# Altium PCB ArcadeRpiSmartShield 33.PcbDoc
Units mm, origin at the board's own origin, x right, y up, seen from the top; angles counter-clockwise.
Board outline 75 x 56.5 mm, 2 copper layers (Top Layer, Bottom Layer), stack 1.525 mm thick; 24 components, 34 nets, 189 pads, 20 vias.
Unrouted connection lines stored in the file: 4.
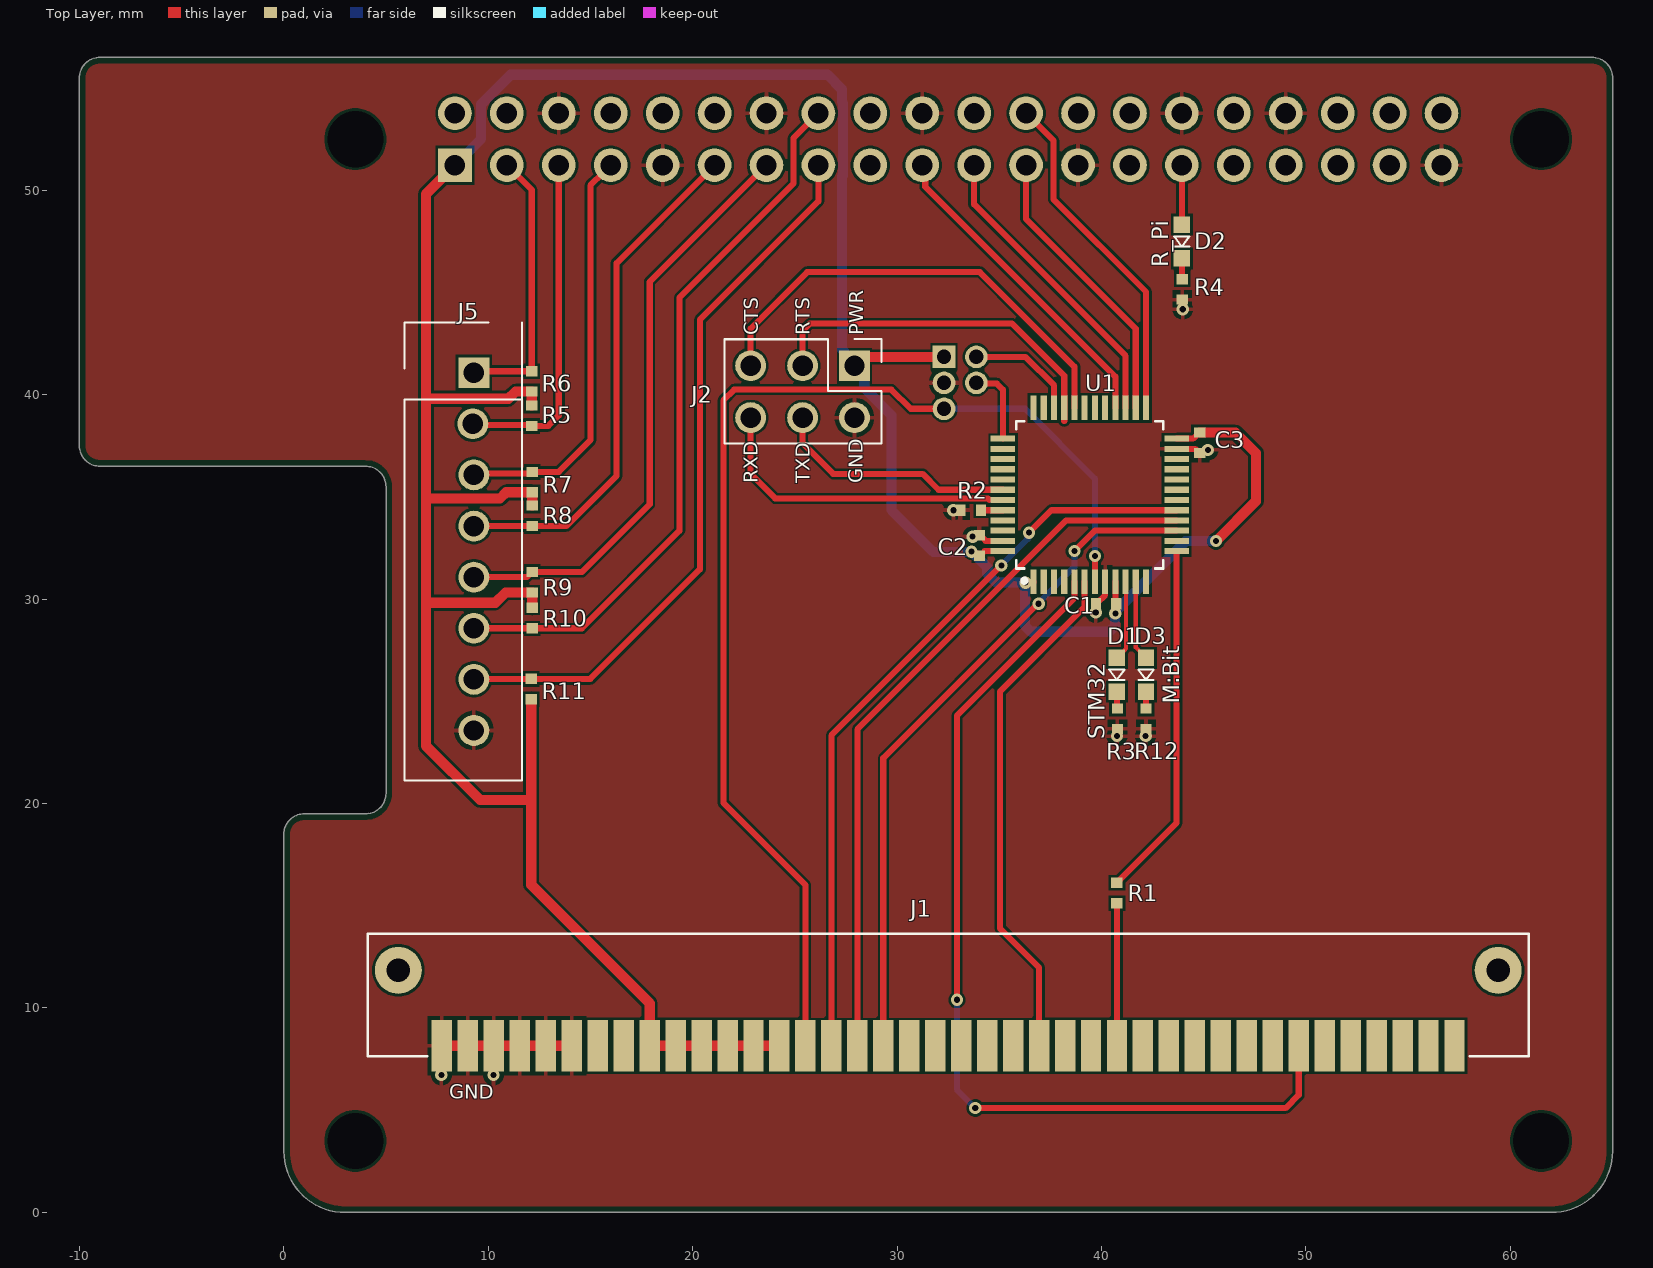
[diagram p0: Top Layer view]
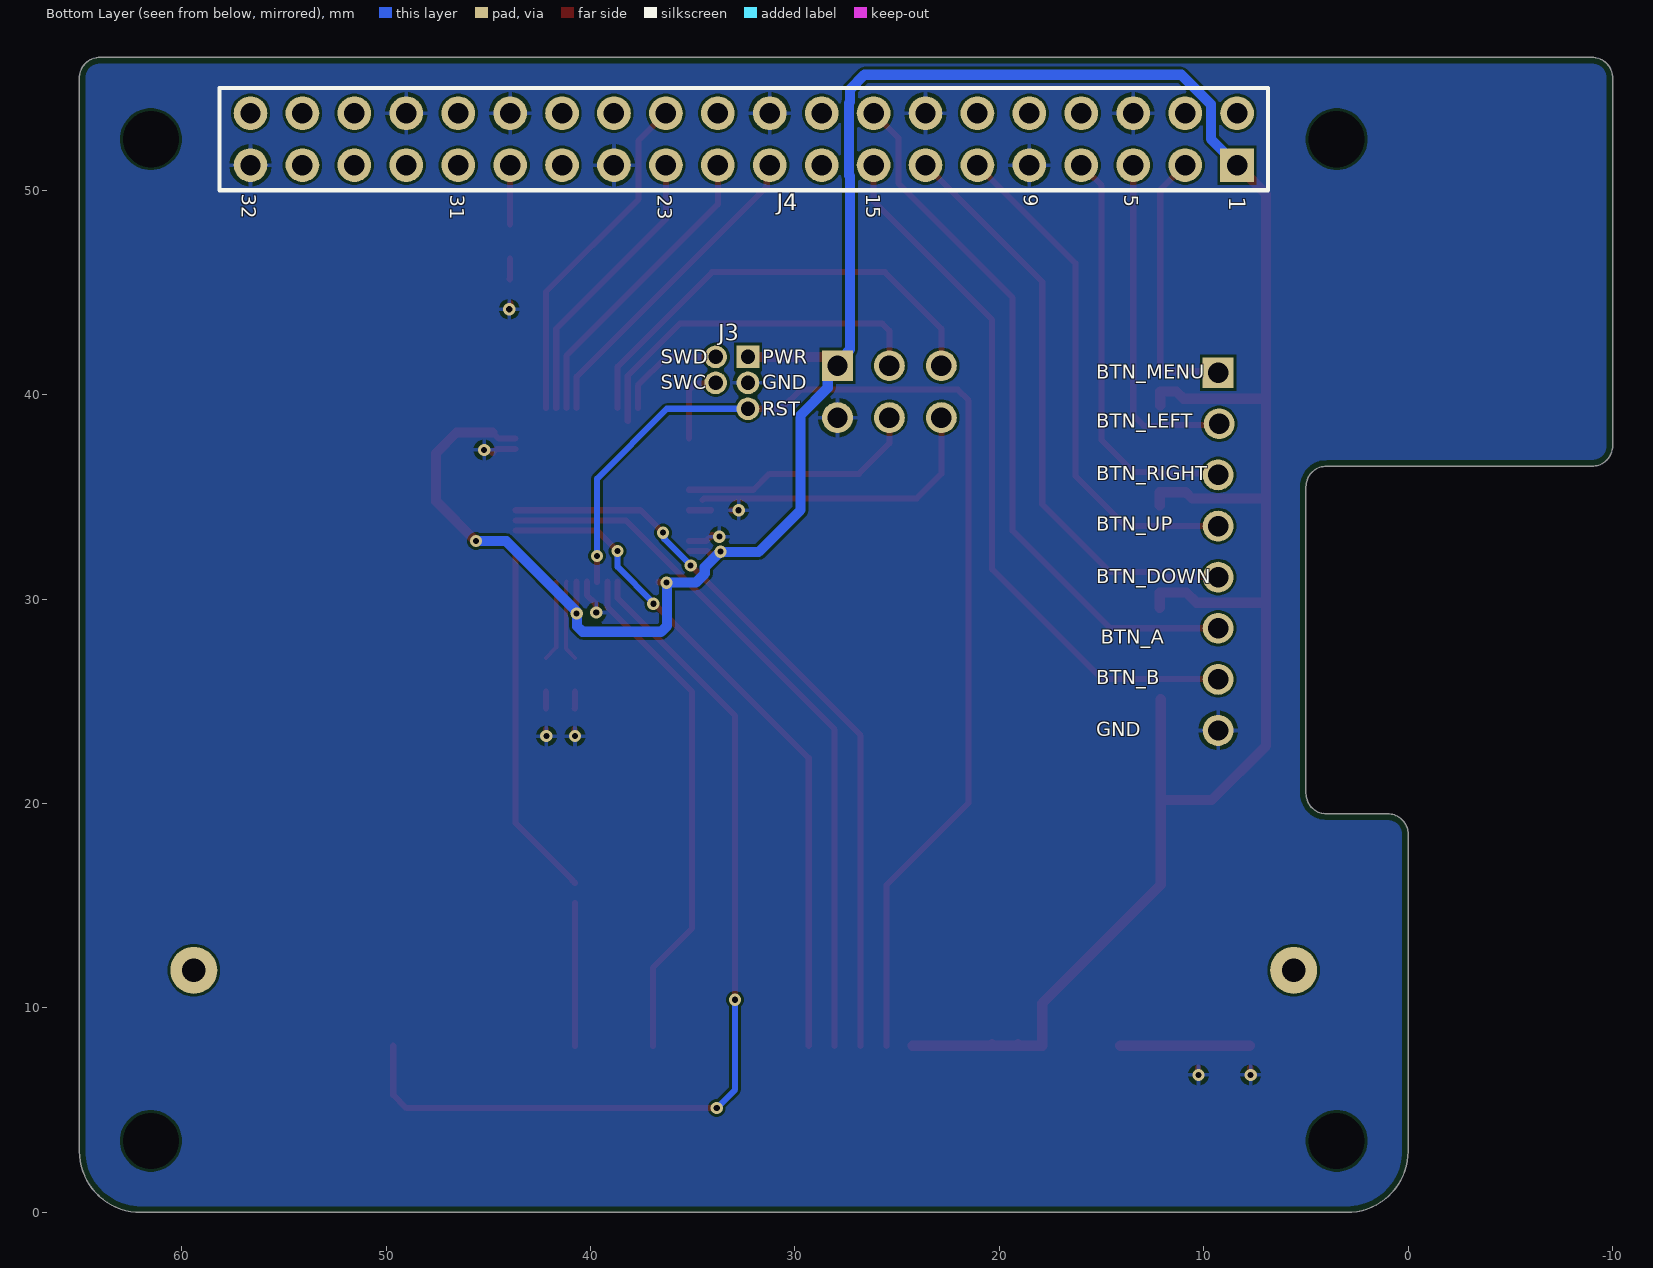
[diagram p1: Bottom Layer view, seen from below]

## Layer stack, top to bottom
Top Solder: solder mask 0.0102, Solder Resist, Dk 3.5
Top Layer: signal copper 0.0356
Dielectric 1: core 1.454, FR-4, Dk 4.2
Bottom Layer: signal copper 0.0356
Bottom Solder: solder mask 0.0102, Solder Resist, Dk 3.5

## Board outline
0,3 0,18.5 cw(c1,18.5) 1,19.5 4,19.5 ccw(c4,20.5) 5,20.5 5,35.5 ccw(c4,35.5) 4,36.5 -9,36.5 cw(c-9,37.5) -10,37.5 -10,55.5 cw(c-9,55.5) -9,56.5 64,56.5 cw(c64,55.5) 65,55.5 65,3 cw(c62,3) 62,0 3,0 cw(c3,3)

## Design rules (kind name [scope] priority, off if disabled: settings)
AssemblyTestPointUsage [All] p1: valid=2
BoardOutlineClearance [All] p1: gap=0.3 ignorepadtopadclearanceinfootprint=FALSE except(0: Arc-SplitContinuation Track-SplitContinuation SMDPad-OutlineEdge SMDPad-SplitContinuation THPad-OutlineEdge THPad-SplitContinuation Via-SplitContinuation Fill-SplitContinuation Poly-SplitContinuation Region-OutlineEdge Region-SplitContinuation Text-SplitContinuation; 0.2: Track-OutlineEdge Text-OutlineEdge)
Clearance [All] p1: gap=0.125 ignorepadtopadclearanceinfootprint=FALSE except(0: Arc-Hole Track-Hole SMDPad-Hole THPad-Hole Via-Hole Fill-Hole Poly-Hole Region-Hole Text-Hole)
ComponentClearance [All] p1: gap=0.2 collisioncheckmode=3 verticalgap=0.2 showdistances=FALSE
DiffPairsRouting [All] p1: maxlimit=2 minlimit=0.15 mostfreqgap=0.15 toplayer_minwidth=0.15 toplayer_maxwidth=2 toplayer_prefwidth=0.15 bottomlayer_minwidth=0.15 bottomlayer_maxwidth=2 bottomlayer_prefwidth=0.15 substack1={CB9D278B-8BF5-444A-AAF4-837A2A9DF42D} toplayer_{cb9d278b-8bf5-444a-aaf4-837a2a9df42d}_minwidth=0.381 toplayer_{cb9d278b-8bf5-444a-aaf4-837a2a9df42d}_maxwidth=0.381 toplayer_{cb9d278b-8bf5-444a-aaf4-837a2a9df42d}_prefwidth=0.381 bottomlayer_{cb9d278b-8bf5-444a-aaf4-837a2a9df42d}_minwidth=0.381 bottomlayer_{cb9d278b-8bf5-444a-aaf4-837a2a9df42d}_maxwidth=0.381 bottomlayer_{cb9d278b-8bf5-444a-aaf4-837a2a9df42d}_prefwidth=0.381 substack2={826B8647-A721-4255-895A-19F9591B9CD1} toplayer_{826b8647-a721-4255-895a-19f9591b9cd1}_minwidth=0.381 toplayer_{826b8647-a721-4255-895a-19f9591b9cd1}_maxwidth=0.381 toplayer_{826b8647-a721-4255-895a-19f9591b9cd1}_prefwidth=0.381 bottomlayer_{826b8647-a721-4255-895a-19f9591b9cd1}_minwidth=0.381 bottomlayer_{826b8647-a721-4255-895a-19f9591b9cd1}_maxwidth=0.381 bottomlayer_{826b8647-a721-4255-895a-19f9591b9cd1}_prefwidth=0.381 substack3={E64FCAF4-1BC8-437D-B1E0-0E5F2DC0F59E} toplayer_{e64fcaf4-1bc8-437d-b1e0-0e5f2dc0f59e}_minwidth=0.381 toplayer_{e64fcaf4-1bc8-437d-b1e0-0e5f2dc0f59e}_maxwidth=0.381 toplayer_{e64fcaf4-1bc8-437d-b1e0-0e5f2dc0f59e}_prefwidth=0.381 bottomlayer_{e64fcaf4-1bc8-437d-b1e0-0e5f2dc0f59e}_minwidth=0.381 bottomlayer_{e64fcaf4-1bc8-437d-b1e0-0e5f2dc0f59e}_maxwidth=0.381 bottomlayer_{e64fcaf4-1bc8-437d-b1e0-0e5f2dc0f59e}_prefwidth=0.381 substack4={E61CE66C-507C-4E1E-8E83-C905434AFC1C} toplayer_{e61ce66c-507c-4e1e-8e83-c905434afc1c}_minwidth=0.381 toplayer_{e61ce66c-507c-4e1e-8e83-c905434afc1c}_maxwidth=0.381 toplayer_{e61ce66c-507c-4e1e-8e83-c905434afc1c}_prefwidth=0.381 bottomlayer_{e61ce66c-507c-4e1e-8e83-c905434afc1c}_minwidth=0.381 bottomlayer_{e61ce66c-507c-4e1e-8e83-c905434afc1c}_maxwidth=0.381 bottomlayer_{e61ce66c-507c-4e1e-8e83-c905434afc1c}_prefwidth=0.381 maxuncoupledlength=25
FabricationTestPointUsage [All] p1: valid=2 allowmultiple=FALSE
HoleSize [All] p1: absolutevalues=TRUE maxlimit=5 minlimit=0.2 maxpercent=80.000 minpercent=20.000
MinimumSolderMaskSliver [All] p1: minsoldermaskwidth=0.005
PlaneClearance [All] p1: clearance=0.3
PlaneConnect [All] p1: planeconnectstyle=Relief reliefexpansion=0.5 reliefentries=4 reliefconductorwidth=0.2 reliefairgap=0.3
PolygonConnect "PolygonConnect GND" [isVIA] p1: connectstyle=Relief reliefconductorwidth=0.2 reliefentries=4 polygonreliefangle="90 Angle" airgapwidth=0.2
PolygonConnect [All] p2: connectstyle=Relief reliefconductorwidth=0.2 reliefentries=4 polygonreliefangle="90 Angle" airgapwidth=0.2
RoutingVias [All] p1: holewidth=0.3 width=0.6 viastyle="Through Hole" minholewidth=0.3 minwidth=0.6 maxholewidth=0.3 maxwidth=0.8
SilkToSilkClearance [All] p1: silktosilkclearance=0.001
SilkToSolderMaskClearance [IsPad] p1: minsilkscreentomaskgap=0.05 clearancetoexposedcopper=TRUE
SolderMaskExpansion [All] p1: expansion=0.075 istentingtop=FALSE
Width [All] p1: maxlimit=2 minlimit=0.15 preferedwidth=0.15 substack1={CB9D278B-8BF5-444A-AAF4-837A2A9DF42D} substack2={826B8647-A721-4255-895A-19F9591B9CD1} substack3={E64FCAF4-1BC8-437D-B1E0-0E5F2DC0F59E} substack4={E61CE66C-507C-4E1E-8E83-C905434AFC1C} minimp=50.000000 maximp=50.000000 favimp=50.000000
20 further rules are at their usual default settings.

## Components (designator, comment, footprint, x,y, rotation, side; value= is the part's Value field where it differs from the comment)
C1 "CL05B104KQ5NNNC" "C0402_0.55MM - without outline" 40.225,29.775 r0 top
C2 "CL05B104KQ5NNNC" "C0402_0.55MM - without outline" 34.025,32.625 r270 top
C3 "CL05B104KQ5NNNC" "C0402_0.55MM - without outline" 44.8,37.65 r90 top
D1 "SML-D12D" "ROHM SML-D12 ORANGE - WITHOUT OUTLINE" 40.75,26.3 r90 top
D2 "SML-D12P" "ROHM SML-D12 GREEN - WITHOUT OUTLINE" 43.93,47.495 r90 top
D3 "SML-D12U" "ROHM SML-D12 RED - WITHOUT OUTLINE" 42.175,26.3 r90 top
J1 "Right Angle 1x40p 1.27 mm pitch edge connector for the micro:bit" MIC127-140-A01 32.5,10 r180 top locked
J2 "HDR 2x3 0.100\"" PREC003DFAN-RC 25.375,40.15 r180 top
J3 "Hack Connect Mini 1.27 mm pitch 2-row" HACK_CONNECT_MINI_5_X_1_27 32.297,41.85 r0 bottom
J4 "SSW-120-01-G-D" SAMTEC-SSW-120-01-G-D 32.5,52.5 r180 bottom locked
J5 "HDR 8x1 0.098\"" B8B-XH-A(LF)(SN) 9.275,32.325 r270 top
R1 "RC0402FR-071KL" "R0402 - Without outline" 40.75,15.625 r270 top
R2 "RC0402FR-07100KL" "R0402 - Without outline" 33.6,34.35 r0 top
R3 "RC0402FR-071KL" "R0402 - Without outline" 40.775,24.15 r90 top
R4 "RC0402FR-071KL" "R0402 - Without outline" 43.95,45.15 r90 top
R5 "RC0402FR-07100KL" "R0402 - Without outline" 12.125,38.975 r270 top
R6 "RC0402FR-07100KL" "R0402 - Without outline" 12.125,40.65 r90 top
R7 "RC0402FR-07100KL" "R0402 - Without outline" 12.15,35.725 r90 top
R8 "RC0402FR-07100KL" "R0402 - Without outline" 12.15,34.075 r270 top
R9 "RC0402FR-07100KL" "R0402 - Without outline" 12.154,30.822 r90 top
R10 "RC0402FR-07100KL" "R0402 - Without outline" 12.15,29.075 r270 top
R11 "RC0402FR-07100KL" "R0402 - Without outline" 12.1,25.6 r90 top
R12 "RC0402FR-071KL" "R0402 - Without outline" 42.175,24.15 r90 top
U1 "STM32F030C8T6" "48-LQFP (7x7)" 39.425,35.1 r90 top

## Footprints (in the part's own frame and the unit in brackets; to place one, negate y for a bottom-side part, rotate by r counter-clockwise, add the part's x,y. Pads: shape width x height; smd on the part's side, far side on the other; paste and mask are expansions set on the pad)
"48-LQFP (7x7)" [mm] "IC MCU 32BIT 64KB FLASH 48LQFP"
  rect 1.2x0.3 smd mask+0.05: 1(-4.25,2.75) 2(-4.25,2.25) 3(-4.25,1.75) 4(-4.25,1.25) 5(-4.25,0.75) 6(-4.25,0.25) 7(-4.25,-0.25) 8(-4.25,-0.75) 9(-4.25,-1.25) 10(-4.25,-1.75) 11(-4.25,-2.25) 12(-4.25,-2.75) 25(4.25,-2.75) 26(4.25,-2.25) 27(4.25,-1.75) 28(4.25,-1.25) 29(4.25,-0.75) 30(4.25,-0.25) 31(4.25,0.25) 32(4.25,0.75) 33(4.25,1.25) 34(4.25,1.75) 35(4.25,2.25) 36(4.25,2.75)
  rect 0.3x1.2 smd mask+0.05: 13(-2.75,-4.25) 14(-2.25,-4.25) 15(-1.75,-4.25) 16(-1.25,-4.25) 17(-0.75,-4.25) 18(-0.25,-4.25) 19(0.25,-4.25) 20(0.75,-4.25) 21(1.25,-4.25) 22(1.75,-4.25) 23(2.25,-4.25) 24(2.75,-4.25) 37(2.75,4.25) 38(2.25,4.25) 39(1.75,4.25) 40(1.25,4.25) 41(0.75,4.25) 42(0.25,4.25) 43(-0.25,4.25) 44(-0.75,4.25) 45(-1.25,4.25) 46(-1.75,4.25) 47(-2.25,4.25) 48(-2.75,4.25)
  silkscreen extent -4.25,-3.6 3.6,3.6, body extent -4.5,-4.5 4.5,4.5, height 1.4
B8B-XH-A(LF)(SN) [mm]
  rect 1.508x1.508 hole 1: 1(-8.75,0.025)
  round 1.508 hole 1: 2(-6.25,-0.025) 3(-3.75,0.025) 4(-1.25,0.025) 5(1.25,0.025) 6(3.75,0.025) 7(6.25,0.025) 8(8.75,0.025)
  silkscreen extent -11.2,-3.38 11.2,2.38, body extent -11.2,-3.38 11.2,2.37, height 7
"C0402_0.55MM - without outline" [mm]
  rect 0.5x0.55 smd: 1(-0.5,0) 2(0.5,0)
  body extent -0.5,-0.25 0.5,0.25, height 0.55
HACK_CONNECT_MINI_5_X_1_27 [mm]
  rect 1.11x1.11 hole 0.7: 1(0,0)
  round 1.11 hole 0.7: 2(1.578,0) 3(0,1.27) 4(1.578,1.27) 5(0,2.54)
MIC127-140-A01 [mm] "Right Angle 1x40p 1.27 mm pitch edge connector for the micro:bit"
  rect 1x2.5 smd paste-0.254: 1(-24.765,1.845) 2(-23.495,1.845) 3(-22.225,1.845) 4(-20.955,1.845) 5(-19.685,1.845) 6(-18.415,1.845) 7(-17.145,1.845) 8(-15.875,1.845) 9(-14.605,1.845) 10(-13.335,1.845) 11(-12.065,1.845) 12(-10.795,1.845) 13(-9.525,1.845) 14(-8.255,1.845) 15(-6.985,1.845) 16(-5.715,1.845) 17(-4.445,1.845) 18(-3.175,1.845) 19(-1.905,1.845) 20(-0.635,1.845) 21(0.635,1.845) 22(1.905,1.845) 23(3.175,1.845) 24(4.445,1.845) 25(5.715,1.845) 26(6.985,1.845) 27(8.255,1.845) 28(9.525,1.845) 29(10.795,1.845) 30(12.065,1.845) 31(13.335,1.845) 32(14.605,1.845) 33(15.875,1.845) 34(17.145,1.845) 35(18.415,1.845) 36(19.685,1.845) 37(20.955,1.845) 38(22.225,1.845) 39(23.495,1.845) 40(24.765,1.845)
  round 2.3 hole 1.15 unplated mask+0: ""(-26.9,-1.845) ""(26.9,-1.845)
  silkscreen extent -28.4,-3.64 28.4,2.36, body extent -28.37,-3.62 28.43,2.77, height 10.1
PREC003DFAN-RC [mm]
  rect 1.508x1.508 hole 1: 1(-2.54,-1.27)
  round 1.508 hole 1: 2(-2.54,1.27) 3(0,-1.27) 4(0,1.27) 5(2.54,-1.27) 6(2.54,1.27)
  silkscreen extent -3.86,-2.58 3.81,2.54, body extent -3.77,-2.55 3.85,2.53, height 10.66
"R0402 - Without outline" [mm]
  rect 0.5x0.55 smd: 1(-0.5,0) 2(0.5,0)
  body extent -0.5,-0.25 0.5,0.25, height 0.35
"ROHM SML-D12 GREEN - WITHOUT OUTLINE" [mm]
  rect 0.8x0.8 smd paste-0.05: 1(-0.825,0) 2(0.825,0)
  silkscreen extent -0.25,-0.38 0.25,0.38, body extent -0.8,-0.4 0.8,0.4, height 0.55
"ROHM SML-D12 ORANGE - WITHOUT OUTLINE" [mm]
  rect 0.8x0.8 smd paste-0.05: 1(-0.825,0) 2(0.825,0)
  silkscreen extent -0.25,-0.38 0.25,0.38, body extent -0.8,-0.4 0.8,0.4, height 0.54
"ROHM SML-D12 RED - WITHOUT OUTLINE" [mm]
  rect 0.8x0.8 smd paste-0.05: 1(-0.825,0) 2(0.825,0)
  silkscreen extent -0.25,-0.38 0.25,0.38, body extent -0.8,-0.4 0.8,0.4, height 0.55
SAMTEC-SSW-120-01-G-D [mm]
  rect 1.65x1.65 / inner round 1.65 / far side rect 1.65x1.65 hole 1 mask+0: 1(24.13,-1.27)
  round 1.65 hole 1 mask+0: 2(24.13,1.27) 3(21.59,-1.27) 4(21.59,1.27) 5(19.05,-1.27) 6(19.05,1.27) 7(16.51,-1.27) 8(16.51,1.27) 9(13.97,-1.27) 10(13.97,1.27) 11(11.43,-1.27) 12(11.43,1.27) 13(8.89,-1.27) 14(8.89,1.27) 15(6.35,-1.27) 16(6.35,1.27) 17(3.81,-1.27) 18(3.81,1.27) 19(1.27,-1.27) 20(1.27,1.27) 21(-1.27,-1.27) 22(-1.27,1.27) 23(-3.81,-1.27) 24(-3.81,1.27) 25(-6.35,-1.27) 26(-6.35,1.27) 27(-8.89,-1.27) 28(-8.89,1.27) 29(-11.43,-1.27) 30(-11.43,1.27) 31(-13.97,-1.27) 32(-13.97,1.27) 33(-16.51,-1.27) 34(-16.51,1.27) 35(-19.05,-1.27) 36(-19.05,1.27) 37(-21.59,-1.27) 38(-21.59,1.27) 39(-24.13,-1.27) 40(-24.13,1.27)
  silkscreen extent -25.65,-2.5 25.65,2.5, body extent -25.65,-2.48 25.65,2.48, height 8.51

## Part data
C1 C2 C3: "CAP CER 0.1UF 6.3V X7R 0402", Capacitance=100nF, Case Code (Imperial)=0402, Case Code (Metric)=1005, Dielectric=X7R, Manufacturer=Samsung, Max Operating Temperature=125°C, Min Operating Temperature=-55°C, Supplier Part Number 1=1276-1511-1-ND, Tolerance=10%, Voltage Rating=6.3V, Case/Package=0402, Category=Capacitors, Checked By=?, ComponentLink1Description="Online datasheet", ComponentLink1URL=https://datasheet.ciiva.com/25709/cl05b104kq5nnnc-25709268.pdf, Created By="D. Gakure", Depth=0.5mm, Height=0.5mm, Lead Free="Lead Free", Length=1mm, Manufacturer Part Number=CL05B104KQ5NNNC, Mount="Surface Mount", Packaging="Tape and Reel", Pricing 1="1=0.10000, 10=0.02500, 50=0.01380, 100=0.01130, 500=0.00804, 1000=0.00632, 2500=0.00575, 5000=0.00529 (USD)", Pricing 2="1=0.10000, 10=0.02800, 100=0.01200, 500=0.00800, 1000=0.00600, 2500=0.00600 (USD)", Radiation Hardening=No, RoHS=Yes, Stock 1=259020, Stock 2=20000, Supplier 1=Digi-Key, Supplier 2=Mouser, Supplier Part Number 2=187-CL05B104KQ5NNNC, Thickness=0.022inch, Voltage Rating (DC)=6.3V, Width=0.02inch
D1: "1.6 x 0.8 x 0.55mm (0603) LED 605nm Orange", Colour=Orange, Current - Test=20mA, Luminous Flux @ Current - Test=-, Manufacturer="Rohm Semiconductor", Manufacturer Part Number=SML-D12D8WT86, Millicandela Rating=100mcd, Package / Case="0603 (1608 Metric)", Supplier Part Number 1=511-1577-1-ND, Voltage - Forward (Vf) (Typ)=2.2V, Category=Optoelectronics, ComponentLink1Description="Online datasheet", ComponentLink1URL=https://d1d2qsbl8m0m72.cloudfront.net/en/products/databook/datasheet/opto/led/chip_mono/sml-d12x8_d13x8-e.pdf, Height=0.55mm, Lens Style/Size="Rectangle with Flat Top, 1.2mm x 0.8mm", Lens Type="Diffused, White", Mounting Type="Surface Mount", Packaging="Cut Tape (CT)", Pricing 1="1=0.38, 10=0.279, 25=0.2232, 100=0.1478, 250=0.1046, 500=0.08926, 1000=0.06974 (GBP)", RoHS="RoHS Compliant", Size / Dimension="1.60mm L x 0.80mm W", Stock 1=1719, Supplier 1=Digi-Key, Viewing Angle=-, Wavelength - Dominant=605nm, Wavelength - Peak=-
D2: "1.6 x 0.8 x 0.55mm (0603) LED 560nm Green", Colour=Green, Current - Test=20mA, Luminous Flux @ Current - Test=-, Manufacturer="Rohm Semiconductor", Manufacturer Part Number=SML-D12P8WT86, Millicandela Rating=6.3mcd, Package / Case="0603 (1608 Metric)", Supplier Part Number 1=511-1579-1-ND, Voltage - Forward (Vf) (Typ)=2.2V, Category=Optoelectronics, ComponentLink1Description="Online datasheet", ComponentLink1URL=https://d1d2qsbl8m0m72.cloudfront.net/en/products/databook/datasheet/opto/led/chip_mono/sml-d12x8_d13x8-e.pdf, Height=0.55mm, Lens Style/Size="Rectangle with Flat Top, 1.2mm x 0.8mm", Lens Type="Diffused, White", Mounting Type="Surface Mount", Packaging="Cut Tape (CT)", Pricing 1="1=0.38, 10=0.279, 25=0.2232, 100=0.1478, 250=0.1046, 500=0.08926, 1000=0.06974 (GBP)", RoHS="RoHS Compliant", Size / Dimension="1.60mm L x 0.80mm W", Stock 1=19305, Supplier 1=Digi-Key, Viewing Angle=-, Wavelength - Dominant=560nm, Wavelength - Peak=-
D3: "1.6 x 0.8 x 0.55mm (0603) LED 620nm Red", Colour=Red, Current - Test=20mA, Luminous Flux @ Current - Test=-, Manufacturer="Rohm Semiconductor", Manufacturer Part Number=SML-D12U8WT86, Millicandela Rating=63mcd, Package / Case="0603 (1608 Metric)", Supplier Part Number 1=511-1580-1-ND, Voltage - Forward (Vf) (Typ)=2.2V, Category=Optoelectronics, ComponentLink1Description="Online datasheet", ComponentLink1URL=https://d1d2qsbl8m0m72.cloudfront.net/en/products/databook/datasheet/opto/led/chip_mono/sml-d12x8_d13x8-e.pdf, Height=0.55mm, Lens Style/Size="Rectangle with Flat Top, 1.2mm x 0.8mm", Lens Type="Diffused, White", Mounting Type="Surface Mount", Packaging="Cut Tape (CT)", Pricing 1="1=0.38, 10=0.279, 25=0.2232, 100=0.1478, 250=0.1046, 500=0.08926, 1000=0.06974 (GBP)", RoHS="RoHS Compliant", Size / Dimension="1.60mm L x 0.80mm W", Stock 1=5722, Supplier 1=Digi-Key, Supplier 2=Farnell, Supplier Part Number 2=1685094, Viewing Angle=-, Wavelength - Dominant=620nm, Wavelength - Peak=-
J1: library part MIC127-140-A01, "\"Right Angle\" 1x40p 1.27mm Dongguan Yuliang BBC micro:bit edge connector", Manufacturer="Dongguan Yuliang", ComponentLink1Description="Yuliang drawing", ComponentLink1URL=http://www.dgyuliang.net/d/file/Produtcs/Customized%20Connector/MICRO%20BIT%20Connector/0d43030af84ade6fc3f00e242079c055.pdf, Manufacturer Part Number=MIC127-140-A01
J2: library part PREC003DFAN-RC, "CONN HEADER VERT 6POS 2.54MM", Color=Black, Manufacturer=Sullins, Package Quantity=1, Supplier Part Number 1=S2212EC-03-ND, Category=Connectors, Checked By=?, ComponentLink1Description="Online datasheet", ComponentLink1URL=https://datasheet.ciiva.com/741/xrxczzzdxxn-rc-11636-b-741002.pdf, Connector Type="Male Pin", Contact Mating Length=0.318inch, Contact Plating=Tin, Contact Type="Male Pin", Created By="D. Gakure", Manufacturer Part Number=PREC003DFAN-RC, Mount="Through Hole", Number of Positions=6, Number of Rows=2, Packaging=Bulk, Pitch=0.1inch, Pricing 1="1=0.16000, 10=0.15100, 25=0.12920, 50=0.11280, 100=0.10480, 250=0.09272, 500=0.08870 (USD)", RoHS=Yes, RoHS Compliant=Yes, Row Spacing=0.1inch, Stock 1=1243, Supplier 1=Digi-Key, Termination=Solder
J3: library part HACK_CONNECT_MINI
J4: "20 position 2 row (40 way) 0.1\" TH socket", Color=Black, Contact Resistance=10mR, Current Rating=6.9A, Manufacturer=Samtec, Max Operating Temperature=125°C, Max Voltage Rating (AC)=550V, Min Operating Temperature=-55°C, Supplier Part Number 1=SAM1208-20-ND, ComponentLink1Description="samtec catalogue page online", ComponentLink1URL=http://suddendocs.samtec.com/catalog_english/ssw_th.pdf, ComponentLink2Description="samtec drawing online", ComponentLink2URL=http://suddendocs.samtec.com/prints/ssw-1xx-xx-xxx-x-xx-xxx-xx-mkt.pdf, Connector Type=Receptacle,Socket, Contact Material=Bronze, Contact Plating=Gold, Depth=4.95mm, Gender=Receptacle, Housing Color=Black, Housing Material=Polymer, Lead Free="Lead Free", Lead Pitch=2.54mm, Length=51.31mm, Manufacturer Part Number=SSW-120-01-G-D, Mating Cycles=100, Max Current Rating=6.9A, Mount="Through Hole", Number of Contacts=40, Number of Positions=40, Number of Rows=2, Orientation=Straight, Packaging=Bulk, Pitch=2.54mm, Pricing 1="1=5.36000, 10=5.14900, 25=4.72040, 50=4.50580, 100=4.29120, 250=3.75480, 500=3.64752 (USD)", Radiation Hardening=No, REACH SVHC="No SVHC", RoHS=Yes, Row Spacing=0.1inch, Stock 1=0, Supplier 1=Digi-Key, Supplier 2=Farnell, Supplier 3=Mouser, Supplier 4=RSComponents, Supplier Part Number 2=1668397, Supplier Part Number 3=200-SSW12001GD, Supplier Part Number 4=7655802, Termination=Solder, Voltage Rating=550V
J5: library part B8B-XH-A(LF)(SN), "CONN HEADER VERT 8POS 2.5MM", Color=Natural, Contact Resistance=20mR, Current Rating=3A, Housing Color=White, Insulation Resistance=1GR, Manufacturer=JST, Max Operating Temperature=85°C, Max Voltage Rating (AC)=250V, Min Operating Temperature=-25°C, Supplier Part Number 1=455-2251-ND, Category="FFC / FPC", Checked By=?, ComponentLink1Description="Online datasheet", ComponentLink1URL=https://datasheet.ciiva.com/26894/getdatasheetpartid-440408-26894817.pdf, Connector Type="Male Pin", Contact Material=Brass, Contact Plating=Tin,Copper,Lead, Created By="D. Gakure", Depth=5.75mm, Fastening Type=Detent, Housing Material=Polyamide, Lead Free="Lead Free", Lead Pitch=2.5mm, Length=22.4mm, Manufacturer Part Number=B8B-XH-A(LF)(SN), Max Current Rating=3A, Mount="Through Hole", Number of Contacts=8, Number of Positions=8, Number of Rows=1, Orientation=Straight, Packaging=Bulk, Pitch=2.5mm, Pricing 1="1=0.360000, 10=0.341000, 100=0.238700, 500=0.204580, 1000=0.170480, 5000=0.146130, 10000=0.136390 (USD)", Pricing 2="10=0.27000, 100=0.18800, 500=0.16200, 1000=0.13500, 2500=0.12500, 5000=0.11500 (GBP)", REACH SVHC="No SVHC", RoHS=Yes, Stock 1=6017, Stock 2=11541, Supplier 1=Digi-Key, Supplier 2=Farnell, Supplier Part Number 2=1516284, Termination=Press-Fit, Voltage Rating=250V, Voltage Rating (AC)=250V, Wire/Cable Gauge=22AWG
R1 R3 R4 R12: "RES SMD 1K OHM 1% 1/16W 0402", Case Code (Imperial)=0402, Case Code (Metric)=1005, Manufacturer=Yageo, Max Operating Temperature=155°C, Min Operating Temperature=-55°C, Power Rating=62.5mW, Resistance=1kR, Resistor Type="Thick Film", Supplier Part Number 1=311-1.00KLRDKR-ND, Temperature Coefficient=100ppm/°C, Tolerance=1%, Voltage Rating=50V, Case/Package=0402, Category=Resistors, Checked=?, ComponentLink2Description="Online datasheet", ComponentLink2URL=https://datasheet.ciiva.com/12666/pyu-rc0402-51-rohs-l-6-r-12666741.pdf, Created=D.G, Depth=0.5mm, Height=0.32mm, Lead Free="Lead Free", Length=1mm, Manufacturer Part Number=RC0402FR-071KL, Military Standard=Not, Number of Pins=2, Packaging="Tape and Reel", Pricing 1="1=0.10000, 10=0.01400, 100=0.00580, 1000=0.00262, 2500=0.00228, 5000=0.00188 (USD)", Pricing 2="1=0.10000, 10=0.01200, 100=0.00400, 1000=0.00400, 2500=0.00400, 10000=0.00300 (USD)", Pricing 3="1=0.08130, 25=0.01210, 100=0.01120, 250=0.01030, 500=0.00900 (GBP)", REACH SVHC=Unknown, RoHS=Yes, Stock 1=37591306, Stock 2=11912978, Stock 3=29900, Supplier 1=Digi-Key, Supplier 2=Mouser, Supplier 3=Farnell, Supplier Part Number 2=603-RC0402FR-071KL, Supplier Part Number 3=2132441, Termination=SMD/SMT, Voltage Rating (DC)=50V, Width=0.5mm
R2 R5 R6 R7 R8 R9 R10 R11: "RES SMD 100K OHM 1% 1/16W 0402", Case Code (Imperial)=0402, Case Code (Metric)=1005, Manufacturer=Yageo, Max Operating Temperature=155°C, Max Power Dissipation=63mW, Min Operating Temperature=-55°C, Package Quantity=1, Resistance=100kR, Resistor Type="Thick Film", Supplier Part Number 1=311-100KLRCT-ND, Temperature Coefficient=100ppm/°C, Tolerance=1%, Voltage Rating=50V, Case/Package=0402, Category=Resistors, Checked By=?, ComponentLink2Description="Online datasheet", ComponentLink2URL=https://datasheet.ciiva.com/2453/pyu-r-int-thick-7-2453361.pdf, Created By=DG, Depth=0.5mm, Features="Moisture Resistant", Height=0.016inch, Lead Free="Lead Free", Length=0.039inch, Manufacturer Part Number=RC0402FR-07100KL, Military Standard=Not, Number of Terminations=2, Packaging="Tape and Reel", Power Rating=63mW, Pricing 1="1=0.10000, 10=0.01400, 100=0.00580, 1000=0.00262, 2500=0.00228, 5000=0.00188 (USD)", Pricing 2="1=0.10000, 10=0.01200, 100=0.00400, 1000=0.00400, 2500=0.00400, 10000=0.00300 (USD)", Pricing 3="1=0.10200, 25=0.01220, 100=0.01200, 250=0.01020, 500=0.00890 (GBP)", REACH SVHC="No SVHC", RoHS=Yes, Stock 1=5819191, Stock 2=4458847, Stock 3=19392, Supplier 1=Digi-Key, Supplier 2=Mouser, Supplier 3=Farnell, Supplier Part Number 2=603-RC0402FR-07100KL, Supplier Part Number 3=2131798, Termination=SMD/SMT, Width=0.02inch, Working Voltage=50V
U1: "MCU 32-bit STM32F ARM Cortex M0 RISC 64KB Flash 2.5V/3.3V 48-Pin LQFP Tray", Case/Package=LQFP, Frequency=48MHz, Manufacturer=STMicroelectronics, Max Operating Temperature=85°C, Max Power Dissipation=364mW, Max Supply Voltage=3.6V, Min Operating Temperature=-40°C, Min Supply Voltage=2.4V, Package Quantity=250, Supplier Part Number 1=497-14043-ND, Category=Microcontrollers, Checked By=?, ComponentLink1Description="Online datasheet", ComponentLink1URL=https://datasheet.ciiva.com/28647/1792126-28647793.pdf, Contact Plating=Tin,Matte, Core Architecture=ARM, Created By="D. Gakure", Data Bus Width=32b, Height=1.45mm, Interface=I2C,SPI,UART,USART, Lead Free="Lead Free", Length=7.2mm, Manufacturer Part Number=STM32F030C8T6, Max Frequency=48MHz, Memory Size=64KB, Memory Type=FLASH, Number of ADC Channels=12, Number of I2C Channels=2, Number of I/Os=39, Number of Pins=48, Number of Programmable I/O=39, Number of PWM Channels=6, Number of SPI Channels=2, Number of Timers/Counters=7, Oscillator Type=Internal, Packaging=Tray, Peripherals=POR,PWM,WDT,DMA, Pricing 1="1=2.31000, 10=2.07200, 25=1.95520, 80=1.66575, 250=1.56408, 500=1.36856, 1000=1.30340 (USD)", Pricing 2="1=2.19000, 10=1.88000, 100=1.63000, 500=1.38000, 1000=1.16000, 2500=1.13000 (USD)", Radiation Hardening=No, RAM Size=8KB, REACH SVHC="No SVHC", RoHS=Yes, RoHS Compliant=Yes, Stock 2=325, Supplier 1=Digi-Key, Supplier 2=Avnet, Supplier Part Number 2=39X0182, Watchdog Timer=Yes, Width=7.2mm

## Free pads (board coordinates)
  round 0 hole 2.75 unplated mask+3.1: 7(3.5,3.5) 7(3.5,52.5) 7(61.5,3.5) 7(61.5,52.5)

## Via types
v1: diameter 0.6, hole 0.3, Top Layer to Bottom Layer, tented both sides, 20 vias

## Nets (pads, with @x,y where several pads share a name; then routed paths per layer and width w, separated by ;. In a path a pad name is that pad's centre, name@x,y a point inside that pad or via, vN(x,y) a via of type N, cw(c..) or ccw(c..) an arc to the next point about the centre after c; other vN are vias at no path point)
BTN_A: J4.16 J5.6 R10.2 | length 35.3
  Top Layer w0.3: J5.6 R10.2 14.583,28.575 19.35,33.342 19.35,44.75 24.925,50.325 24.925,52.545 J4.16
BTN_B: J4.15 J5.7 R11.2 | length 35.5
  Top Layer w0.3: J5.7 9.312,26.087 12.088,26.087 R11.2 15,26.1 20.35,31.45 20.35,43.665 26.15,49.465 J4.15
BTN_DOWN: J4.13 J5.5 R9.2 | length 29
  Top Layer w0.3: J5.5 11.882,31.075 12.116,31.31 R9.2@12.141,31.31 ; R9.2 14.583,31.322 17.9,34.639 17.9,45.52 J4.13
BTN_LEFT: J4.5 J5.2 R5.2 | length 16.7
  Top Layer w0.3: J5.2 9.3,38.525 12.075,38.525 R5.2 12.938,38.475 13.45,38.988 J4.5
BTN_MB_A: J1.7 U1.5 | length 47
  Top Layer w0.3: v1(32.925,10.4) 32.925,24.3 38.675,30.05 U1.5 ; v1(33.825,5.107) 49.006,5.107 49.645,5.746 J1.7
  Bottom Layer w0.3: v1(32.925,10.4) 32.925,6.007 33.807,5.125 v1@33.825,5.125
BTN_MB_B: J1.17 U1.6 | length 25.2
  Top Layer w0.3: J1.17 36.945,11.98 35.025,13.9 35.025,25.475 39.175,29.625 U1.6
BTN_MENU: J4.3 J5.1 R6.2 | length 13.4
  Top Layer w0.3: J5.1 9.375,41.15 R6.2 12.125,50.015 J4.3
BTN_RIGHT: J4.7 J5.3 R7.2 | length 20.5
  Top Layer w0.3: J5.3 9.375,36.15 12.075,36.15 R7.2 13.45,36.225 15,37.775 15,50.24 15.625,50.865 15.99,50.865 J4.7
BTN_UP: J4.11 J5.4 R8.2 | length 25.9
  Top Layer w0.3: J5.4@9.531,33.344 J5.4 R8.2 13.825,33.575 16.275,36.025 16.275,46.435 J4.11
  Bottom Layer w0.3: J4.11@21.07,50.87 J4.11
CTS: J2.5 U1.32 | length 22.7
  Top Layer w0.3: J2.5 22.835,43.235 25.6,46 34.051,46 38.675,41.376 U1.32
FLOW: R1.1 U1.13 | length 17.5
  Top Layer w0.3: R1.1 40.775,16.125 40.875,16.225 40.875,16.25 43.675,19.05 U1.13
GND: C1.1 C2.1 C3.1 J1.35 J1.36 J1.37 J1.38 J1.39 J1.40 J2.2 J3.3 J4.6 J4.9 J4.14 J4.20 J4.25 J4.30 J4.34 J4.39 J5.8 R2.1 R3.1 R4.1 R12.1 U1.8 U1.23 U1.47 | length 13.3
  Top Layer w0.3: v1@7.725,6.725 J1.40@7.725,7.075 ; v1@10.275,6.725 J1.38@10.275,7.075 ; v1(32.75,34.35) R2.1 ; v1(33.695,33.055) 33.73,33.09 33.99,33.09 C2.1 34.05,33.125 34.325,32.85 U1.47 ; v1(39.716,29.346) 39.721,29.35 39.721,29.771 C1.1 ; C1.1@39.775,29.8 40.175,30.2 U1.8 ; v1@40.775,23.3 R3.1 ; v1@42.175,23.3 R12.1 ; U1.23 44.575,37.35 44.775,37.15 C3.1 44.89,37.24 45.143,37.24 v1(45.2,37.297) ; v1@43.915,44.237 R4.1@43.915,44.49
  Top Layer w0.5: J1.40 J1.39 J1.38 J1.37 J1.36 J1.35
  other v1: 7.707,6.725 10.257,6.725 40.757,23.3 42.157,23.3 43.972,44.18
M:Bit_STATUS: D3.2 U1.11 | length 3.9
  Top Layer w0.2: U1.11 41.675,27.625 D3.2
MB_MISO: J1.24 U1.16 | length 35.3
  Top Layer w0.3: J1.24 28.055,23.63 38.275,33.85 U1.16
MB_MOSI: J1.25 U1.17 | length 36.8
  Top Layer w0.3: J1.25 26.785,23.335 v1(35.1,31.65) ; v1(36.449,33.252) 37.547,34.35 U1.17
  Bottom Layer w0.3: v1(35.1,31.65) 36.392,32.942 36.392,33.195 v1(36.449,33.252)
MB_SCLK: J1.23 U1.15 | length 33.5
  Top Layer w0.3: J1.23 29.325,22.225 36.875,29.775 v1(36.925,29.775) ; v1(38.675,32.35) 39.675,33.35 U1.15
  Bottom Layer w0.3: v1(36.925,29.775) 36.925,29.825 38.675,31.575 v1(38.675,32.35)
NetD1_1: D1.1 R3.2 | length 0.8
  Top Layer w0.3: D1.1 40.762,25.463 40.762,24.662 R3.2
NetD2_1: D2.1 R4.2 | length 1
  Top Layer w0.3: D2.1 43.94,46.66 43.94,45.66 R4.2 R4.2@43.963,45.662
NetD3_1: D3.1 R12.2 | length 0.8
  Top Layer w0.3: R12.2 D3.1
NetJ1_14: J1.14 R1.2 | length 7
  Top Layer w0.3: R1.2 40.75,8.16 J1.14
NetR2_2: R2.2 U1.44 | length 1.1
  Top Layer w0.3: R2.2 U1.44
nRESET: J1.26 J3.5 U1.7 | length 58.5
  Top Layer w0.3: J1.26 25.515,16.02 21.5,20.035 21.5,39.725 22.025,40.25 29.725,40.25 30.665,39.31 J3.5 ; U1.7 v1(39.675,32.107) v1@39.675,32.125
  Bottom Layer w0.3: J3.5 36.265,39.31 39.675,35.9 v1(39.675,32.107)
PI_3V3: C1.2 C2.2 C3.2 J1.27 J1.28 J1.29 J1.30 J1.31 J1.32 J2.1 J3.1 J4.1 R5.1 R6.1 R7.1 R8.1 R9.1 R10.1 R11.1 U1.1 U1.9 U1.24 U1.48 | length 162.6
  Top Layer w0.3: v1(33.643,32.323) 33.725,32.323 33.823,32.225 33.925,32.225 C2.2 34.05,32.125 34.275,32.35 U1.48 ; v1@36.276,30.825 36.675,30.825 U1.1 ; v1(40.675,29.301) 40.7,29.326 40.7,29.75 C1.2 ; U1.9 40.675,29.896 C1.2@40.81,29.761 ; U1.24 44.475,37.85 44.775,38.15 C3.2
  Top Layer w0.5: J4.1 6.95,49.81 6.95,39.8 ; R11.1 12.1,20.175 ; R5.1 R6.1 11.335,40.15 10.985,39.8 6.95,39.8 ; R10.1 12.154,29.575 R9.1 10.847,30.322 10.35,29.825 6.95,29.825 ; R8.1 R7.1 10.875,35.225 10.575,34.925 6.95,34.925 ; J1.31@19.092,8.227 19.02,8.155 J1.32 17.895,10.225 12.1,16.02 12.1,20.175 ; J1.31 20.29,8.155 J1.30@20.362,8.227 ; J1.30 J1.29 J1.28 J1.27 ; J2.1 28.345,41.85 J3.1 ; C3.2 46.55,38.15 47.55,37.15 47.55,34.788 v1(45.6,32.838) ; 6.95,29.825 6.95,34.925 ; 6.95,29.825 6.95,22.825 9.6,20.175 12.1,20.175 ; 6.95,34.925 6.95,39.8
  Bottom Layer w0.5: J4.1 9.65,52.51 9.65,54.207 11.093,55.65 26.6,55.65 27.3,54.95 27.3,54.317 27.35,54.267 27.35,50.733 27.3,50.683 27.3,42.217 27.411,42.106 27.411,41.924 28.394,40.941 28.394,40.331 29.725,39 29.725,34.355 31.776,32.304 33.624,32.304 v1(33.643,32.323) ; v1@33.611,32.291 33.676,32.291 34.407,31.56 34.407,31.248 34.848,30.807 v1(36.276,30.807) 36.257,30.788 36.257,30.111 36.25,30.105 36.25,28.693 36.543,28.4 40.382,28.4 40.656,28.674 40.656,29.282 40.694,29.321 40.694,29.416 44.116,32.838 v1(45.6,32.838)
RPI_CE0: J4.24 U1.25 | length 16.8
  Top Layer w0.3: J4.24 37.656,52.424 37.656,49.544 42.175,45.025 U1.25
RPI_MISO: J4.21 U1.27 | length 15.2
  Top Layer w0.3: J4.21 33.77,49.305 41.175,41.9 U1.27
  Bottom Layer w0.3: J4.21@33.77,50.972 J4.21
RPI_MOSI: J4.19 U1.28 | length 15.8
  Top Layer w0.3: J4.19 31.377,51.083 31.377,50.173 40.675,40.875 U1.28
RPI_SCLK: J4.23 U1.26 | length 14.1
  Top Layer w0.3: J4.23 36.31,48.59 41.675,43.225 U1.26
  Bottom Layer w0.3: J4.23@36.293,51.212 J4.23
RPI_STATUS: D2.2 J4.29 | length 2.9
  Top Layer w0.3: J4.29 43.933,51.227 D2.2@43.933,48.322
RTS: J2.3 U1.33 | length 17.9
  Top Layer w0.3: J2.3 25.375,43.125 25.725,43.475 35.625,43.475 38.175,40.925 U1.33 38.175,38.711
RXD: J2.6 U1.43 | length 15
  Top Layer w0.3: J2.6 22.835,36.125 24.035,34.925 34.439,34.925 34.514,34.85
STM_STATUS: D1.2 U1.10 | length 3.9
  Top Layer w0.2: D1.2 D1.2@41.135,27.51 ; D1.2@41.129,27.515 41.2,27.586 41.2,30.825 U1.10
SWCLK: J3.4 U1.37 | length 3.8
  Top Layer w0.3: J3.4 33.91,40.545 34.88,40.545 35.175,40.25 U1.37
SWDIO: J3.2 U1.34 | length 5.5
  Top Layer w0.3: J3.2 36.276,41.85 37.675,40.451 U1.34
TXD: J2.4 U1.42 | length 12
  Top Layer w0.3: J2.4 25.375,37.625 26.875,36.125 31.25,36.125 32.025,35.35 U1.42
pads on no net: J1. J1.1 J1.2 J1.3 J1.4 J1.5 J1.6 J1.8 J1.9 J1.10 J1.11 J1.12 J1.13 J1.15 J1.16 J1.18 J1.19 J1.20 J1.21 J1.22 J1.33 J1.34 J4.2 J4.4 J4.8 J4.10 J4.12 J4.17 J4.18 J4.22 J4.26 J4.27 J4.28 J4.31 J4.32 J4.33 J4.35 J4.36 J4.37 J4.38 J4.40 U1.2 U1.3 U1.4 U1.12 U1.14 U1.18 U1.19 U1.20 U1.21 U1.22 U1.29 U1.30 U1.31 U1.35 U1.36 U1.38 U1.39 U1.40 U1.41 U1.45 U1.46

## Polygon pours and split planes (outlines as drawn)
GND on Bottom Layer "NONET_L-01_P-001" (solid, pour order 0): 3.969,36.5 cw(c3.969,35.435) 4.722,36.188 cw(c4.051,35.517) 5,35.517 5,20.537 cw(c3.924,20.537) 4.685,19.777 cw(c4.015,20.447) 4.015,19.499 0.979,19.499 ccw(c0.979,18.545) 0.304,19.22 ccw(c1.037,18.486) 0,18.486 0,2.821 ccw(c2.54,2.821) 0.744,1.025 1.025,0.744 ccw(c2.821,2.54) 2.821,0 62.164,0 ccw(c62.164,2.54) 63.96,0.744 64.438,1.222 ccw(c63.082,2.579) 65,2.579 65,55.491 ccw(c63.967,55.491) 64.698,56.221 ccw(c64.025,55.549) 64.025,56.5 -9.028,56.5 ccw(c-9.028,55.568) -9.688,56.227 ccw(c-8.934,55.473) -10,55.473 -10,37.463 ccw(c-9.093,37.463) -9.734,36.822 ccw(c-8.957,37.599) -8.957,36.5
GND on Top Layer "NONET_L-01_P-001" (solid, pour order 1): 3.969,36.5 cw(c3.969,35.435) 4.722,36.188 cw(c4.051,35.517) 5,35.517 5,20.537 cw(c3.924,20.537) 4.685,19.777 cw(c4.015,20.447) 4.015,19.499 0.979,19.499 ccw(c0.979,18.545) 0.304,19.22 ccw(c1.037,18.486) 0,18.486 0,2.821 ccw(c2.54,2.821) 0.744,1.025 1.025,0.744 ccw(c2.821,2.54) 2.821,0 62.164,0 ccw(c62.164,2.54) 63.96,0.744 64.438,1.222 ccw(c63.082,2.579) 65,2.579 65,55.491 ccw(c63.967,55.491) 64.698,56.221 ccw(c64.025,55.549) 64.025,56.5 -9.028,56.5 ccw(c-9.028,55.568) -9.688,56.227 ccw(c-8.934,55.473) -10,55.473 -10,37.463 ccw(c-9.093,37.463) -9.734,36.822 ccw(c-8.957,37.599) -8.957,36.5

## Silkscreen, mask and mechanical layers (free items; w line width, h text height)
Top Overlay:
  text "R_Pi" at 43.275,46.225 h0.8 r90
  text "CTS" at 23.2,42.9 h0.7 r90
  text "RTS" at 25.725,42.9 h0.7 r90
  text "PWR" at 28.35,42.9 h0.7 r90
  text "RXD" at 23.175,35.675 h0.7 r90
  text "TXD" at 25.725,35.675 h0.7 r90
  text "GND" at 28.325,35.675 h0.7 r90
  text "M:Bit" at 43.8,24.875 h0.8 r90
  text "STM32" at 40.167,23.151 h0.8 r90
  text "GND" at 8.1,5.57 h0.7
Bottom Overlay:
  text "9" at 18.811,49.806 h0.7 r90
  text "15" at 26.5,49.825 h0.7 r90
  text "32" at 57.05,49.825 h0.7 r90
  text "5" at 13.9,49.775 h0.7 r90
  text "23" at 36.7,49.775 h0.7 r90
  text "31" at 46.85,49.775 h0.7 r90
  text "PWR" at 31.6,41.525 h0.7
  text "SWD" at 36.55,41.525 h0.7
  text "BTN_MENU" at 15.25,40.775 h0.7
  text "GND" at 31.6,40.275 h0.7
  text "SWC" at 36.55,40.275 h0.7
  text "RST" at 31.6,38.975 h0.7
  text "BTN_LEFT" at 15.25,38.375 h0.7
  text "BTN_RIGHT" at 15.25,35.825 h0.7
  text "BTN_UP" at 15.25,33.35 h0.7
  text "BTN_DOWN" at 15.25,30.775 h0.7
  text "BTN_A" at 15.05,27.825 h0.7
  text "BTN_B" at 15.25,25.825 h0.7
  text "GND" at 15.25,23.3 h0.7
Top Component Center:
  lines w1: 1,20 ccw(c1,18.5) -0.5,18.5 -0.5,3 ccw(c3,3) 3,-0.5 62,-0.5 ccw(c62,3) 65.5,3 ; 1,20 cw(c1,19.5) 1.002,20 ; 1,20 cw(c1,19.5) 1.002,20 ; 1,20 1.002,20 ; 1.002,20 4,20 ccw(c4,20.5) 4.5,20.5 4.5,35.5 ccw(c4,35.5) 4,36 -9,36 cw(c-9,37.5) -10.5,37.5 -10.5,55.5 cw(c-9,55.5) -9,57 64,57 cw(c64,55.5) 65.5,55.5 65.5,3 ; 65.5,3 65.5,3
Board Outline:
  the board outline again, w0.254

## Text inside footprints (layer, text, board x,y; h text height)
J4: Bottom Overlay "1" at 8.755,49.68 h0.8 r90; Bottom Assy "1" at 8.755,49.68 h0.8 r90